# Altium PCB PCB1.PcbDoc (part 6 of 10)
Units mm, origin at the board's own origin, x right, y up, seen from the top; angles counter-clockwise.
Board outline 171.83 x 244.04 mm, 2 copper layers (Top Layer, Bottom Layer); 100 components, 186 nets, 878 pads, 221 vias.
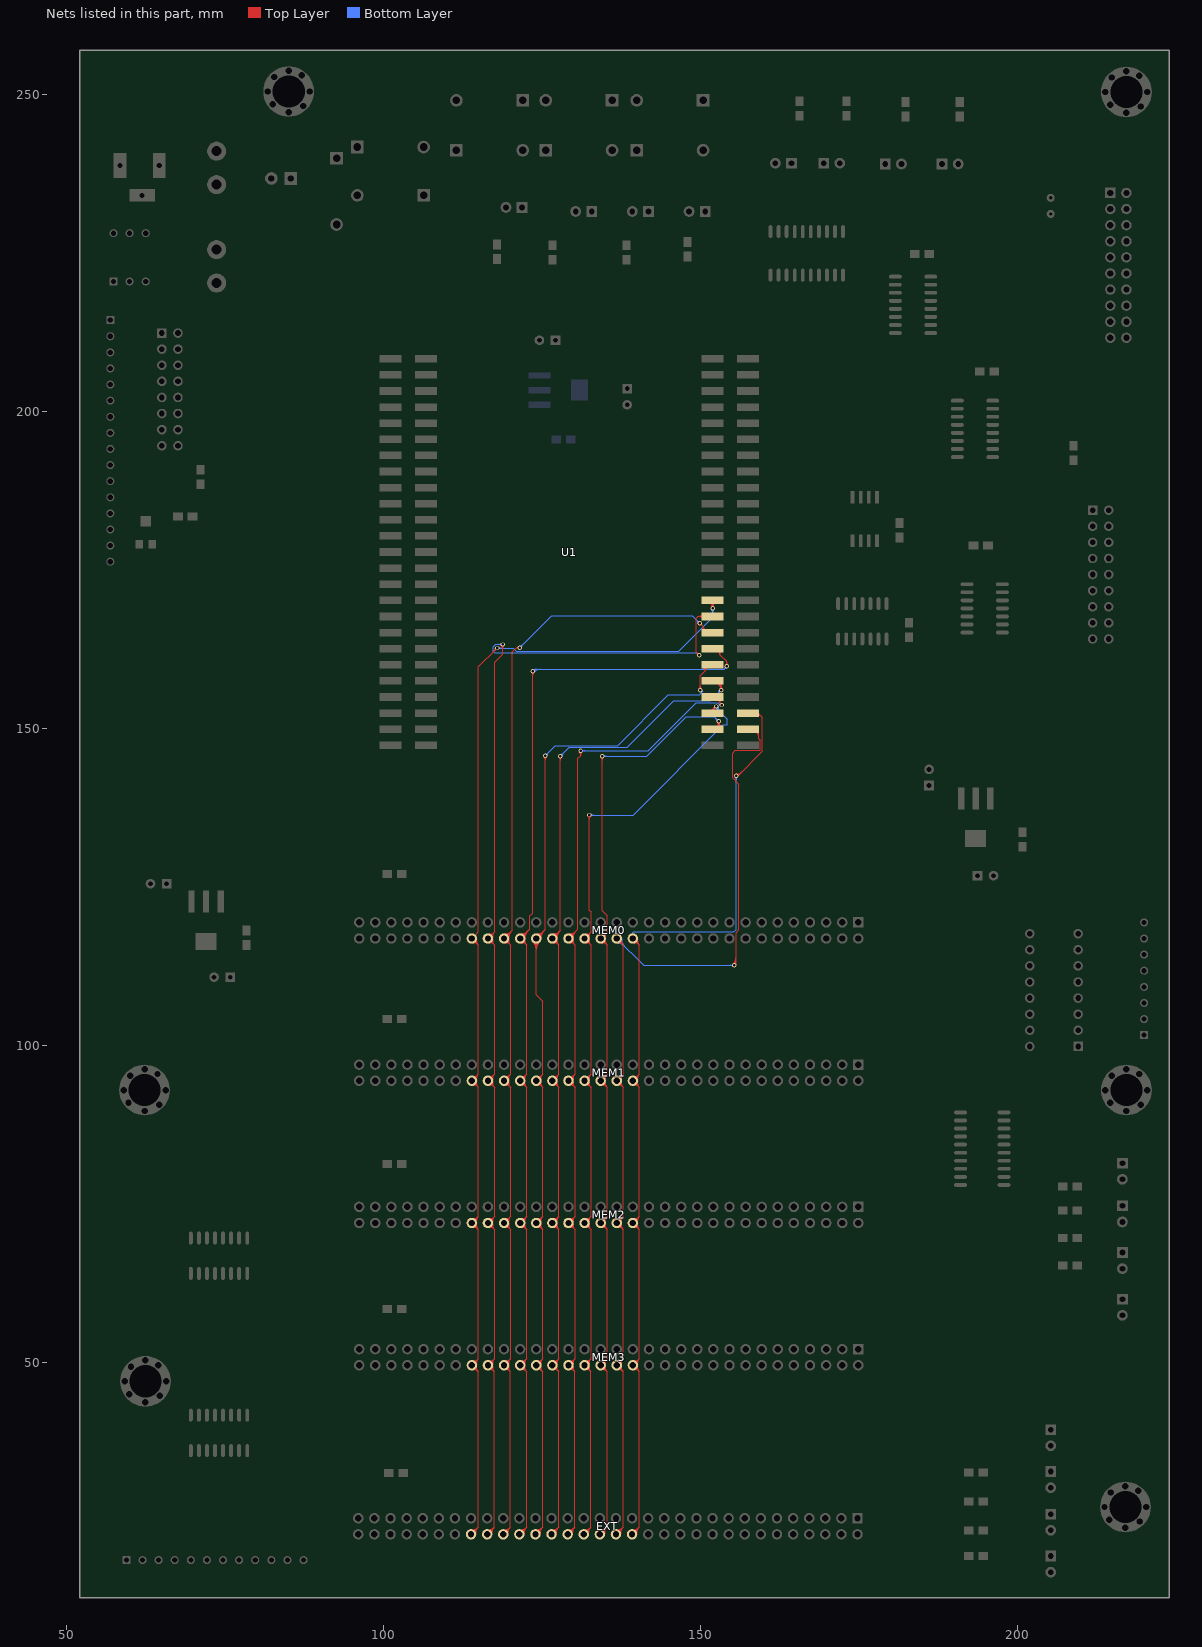
[diagram p6: the nets of this part, all layers, seen from the top]

## Via types
v1: diameter 0.7, hole 0.4, Top Layer to Bottom Layer, 221 vias

## Nets (pads, with @x,y where several pads share a name; then routed paths per layer and width w, separated by ;. In a path a pad name is that pad's centre, name@x,y a point inside that pad or via, vN(x,y) a via of type N, cw(c..) or ccw(c..) an arc to the next point about the centre after c; other vN are vias at no path point) (continued)
D14: EXT.30 MEM0.30 MEM1.30 MEM2.30 MEM3.30 U1.46 | length 198.4
  Top Layer w0.152: EXT.30@139.192,22.86 140.335,24.003 ; EXT.30@139.228,23.302 ccw(c139.295,24.112) 139.87,23.538 ccw(c140.444,22.963) EXT.30@139.634,22.896 ; EXT.30@139.241,23.454 ccw(c139.331,24.542) 140.102,23.77 ccw(c140.874,22.999) EXT.30@139.786,22.909 ; EXT.30@139.254,23.606 ccw(c139.366,24.972) 140.335,24.003 ; MEM0.30@139.319,116.84 140.36,115.799 ; MEM3.30@139.388,49.969 ccw(c139.486,50.598) 139.936,50.147 ccw(c140.387,49.697) MEM3.30@139.758,49.599 ; MEM2.30@139.388,71.528 cw(c139.486,70.899) 139.936,71.349 cw(c140.387,71.799) MEM2.30@139.758,71.898 ; MEM2.30@139.388,72.405 ccw(c139.486,73.034) 139.936,72.584 ccw(c140.387,72.134) MEM2.30@139.758,72.035 ; MEM1.30@139.388,93.965 cw(c139.486,93.336) 139.936,93.786 cw(c140.387,94.236) MEM1.30@139.758,94.335 ; MEM1.30@139.388,94.842 ccw(c139.486,95.471) 139.936,95.021 ccw(c140.387,94.571) MEM1.30@139.758,94.472 ; MEM0.30@139.388,116.401 cw(c139.486,115.772) 139.936,116.223 cw(c140.387,116.673) MEM0.30@139.758,116.771 ; MEM3.30@139.397,49.093 cw(c139.5,48.507) 139.921,48.928 cw(c140.342,49.349) MEM3.30@139.756,49.452 ; MEM3.30@139.411,50.119 ccw(c139.544,50.964) 140.148,50.359 ccw(c140.753,49.755) MEM3.30@139.908,49.622 ; MEM2.30@139.411,71.377 cw(c139.544,70.533) 140.148,71.137 cw(c140.753,71.742) MEM2.30@139.908,71.874 ; MEM2.30@139.411,72.556 ccw(c139.544,73.401) 140.148,72.796 ccw(c140.753,72.191) MEM2.30@139.908,72.059 ; MEM1.30@139.411,93.814 cw(c139.544,92.969) 140.148,93.574 cw(c140.753,94.179) MEM1.30@139.908,94.311 ; MEM1.30@139.411,94.993 ccw(c139.544,95.837) 140.148,95.233 ccw(c140.753,94.628) MEM1.30@139.908,94.496 ; MEM0.30@139.411,116.251 cw(c139.544,115.406) 140.148,116.011 cw(c140.753,116.615) MEM0.30@139.908,116.748 ; MEM3.30@139.423,48.943 cw(c139.563,48.155) 140.128,48.721 cw(c140.694,49.286) MEM3.30@139.906,49.426 ; MEM3.30@139.435,50.27 ccw(c139.601,51.331) 140.36,50.571 ; MEM2.30@139.435,71.227 cw(c139.601,70.166) 140.36,70.925 ; MEM2.30@139.435,72.706 ccw(c139.601,73.767) 140.36,73.008 ; MEM1.30@139.435,93.664 cw(c139.601,92.603) 140.36,93.362 ; MEM1.30@139.435,95.143 ccw(c139.601,96.204) 140.36,95.445 ; MEM0.30@139.435,116.1 cw(c139.601,115.039) 140.36,115.799 ; MEM3.30@139.45,48.793 cw(c139.625,47.804) 140.335,48.514 ; EXT.30@139.938,22.922 cw(c141.304,23.034) 140.335,24.003 ; MEM3.30@140.056,49.399 ccw(c141.045,49.224) 140.335,48.514 ; MEM3.30@140.059,49.646 cw(c141.12,49.812) 140.36,50.571 ; MEM2.30@140.059,71.851 ccw(c141.12,71.685) 140.36,70.925 ; MEM2.30@140.059,72.083 cw(c141.12,72.249) 140.36,73.008 ; MEM1.30@140.059,94.287 ccw(c141.12,94.121) 140.36,93.362 ; MEM1.30@140.059,94.519 cw(c141.12,94.685) 140.36,95.445 ; MEM0.30@140.059,116.724 ccw(c141.12,116.558) 140.36,115.799 ; v1@155.6,142.514 ccw(c155.6,143.175) 156.068,142.707 ; v1(155.6,142.545) 155.905,142.545 159.713,146.352 159.713,151.717 159.029,152.4 U1.46@157.48,152.4 ; v1@155.6,142.666 ccw(c155.6,143.695) 156.328,142.968 ; v1@155.6,142.819 ccw(c155.6,144.215) 156.588,143.228 ; U1.46@158.642,152.335 cw(c158.777,151.61) 159.298,152.131 ; U1.46@158.67,152.185 cw(c158.841,151.265) 159.503,151.926 ; U1.46@158.698,152.035 cw(c158.905,150.92) 159.708,151.722 ; U1.46@159.154,152.4 ccw(c159.454,152.4) 159.242,152.188 ; 140.335,24.003 140.335,48.514 ; 140.335,48.514 MEM3.30@139.319,49.53 140.36,50.571 ; 140.36,50.571 140.36,70.925 ; 140.36,70.925 MEM2.30@139.319,71.967 140.36,73.008 ; 140.36,73.008 140.36,93.362 ; 140.36,93.362 MEM1.30@139.319,94.403 140.36,95.445 ; 140.36,95.445 140.36,115.799
  Bottom Layer w0.152: MEM0.30@139.319,116.84 139.319,117.754 139.446,117.881 155.257,117.881 155.6,118.224 v1(155.6,142.545) ; v1@155.407,142.351 cw(c154.939,141.884) 155.6,141.884 cw(c156.261,141.884) v1@155.794,142.351
D15: EXT.32 MEM0.32 MEM1.32 MEM2.32 MEM3.32 U1.48 | length 218.6
  Top Layer w0.152: EXT.32@136.652,22.86 137.795,24.003 ; EXT.32@136.688,23.302 ccw(c136.755,24.112) 137.33,23.538 ccw(c137.904,22.963) EXT.32@137.094,22.896 ; EXT.32@136.701,23.454 ccw(c136.791,24.542) 137.562,23.77 ccw(c138.334,22.999) EXT.32@137.246,22.909 ; EXT.32@136.714,23.606 ccw(c136.826,24.972) 137.795,24.003 ; MEM0.32@136.779,116.84 137.82,115.799 ; MEM3.32@136.848,49.969 ccw(c136.946,50.598) 137.396,50.147 ccw(c137.847,49.697) MEM3.32@137.218,49.599 ; MEM2.32@136.848,71.528 cw(c136.946,70.899) 137.396,71.349 cw(c137.847,71.799) MEM2.32@137.218,71.898 ; MEM2.32@136.848,72.405 ccw(c136.946,73.034) 137.396,72.584 ccw(c137.847,72.134) MEM2.32@137.218,72.035 ; MEM1.32@136.848,93.965 cw(c136.946,93.336) 137.396,93.786 cw(c137.847,94.236) MEM1.32@137.218,94.335 ; MEM1.32@136.848,94.842 ccw(c136.946,95.471) 137.396,95.021 ccw(c137.847,94.571) MEM1.32@137.218,94.472 ; MEM0.32@136.848,116.401 cw(c136.946,115.772) 137.396,116.223 cw(c137.847,116.673) MEM0.32@137.218,116.771 ; MEM3.32@136.857,49.093 cw(c136.96,48.507) 137.381,48.928 cw(c137.802,49.349) MEM3.32@137.216,49.452 ; MEM3.32@136.871,50.119 ccw(c137.004,50.964) 137.608,50.359 ccw(c138.213,49.755) MEM3.32@137.368,49.622 ; MEM2.32@136.871,71.377 cw(c137.004,70.533) 137.608,71.137 cw(c138.213,71.742) MEM2.32@137.368,71.874 ; MEM2.32@136.871,72.556 ccw(c137.004,73.401) 137.608,72.796 ccw(c138.213,72.191) MEM2.32@137.368,72.059 ; MEM1.32@136.871,93.814 cw(c137.004,92.969) 137.608,93.574 cw(c138.213,94.179) MEM1.32@137.368,94.311 ; MEM1.32@136.871,94.993 ccw(c137.004,95.837) 137.608,95.233 ccw(c138.213,94.628) MEM1.32@137.368,94.496 ; MEM0.32@136.871,116.251 cw(c137.004,115.406) 137.608,116.011 cw(c138.213,116.615) MEM0.32@137.368,116.748 ; MEM3.32@136.883,48.943 cw(c137.023,48.155) 137.588,48.721 cw(c138.154,49.286) MEM3.32@137.366,49.426 ; MEM3.32@136.895,50.27 ccw(c137.061,51.331) 137.82,50.571 ; MEM2.32@136.895,71.227 cw(c137.061,70.166) 137.82,70.925 ; MEM2.32@136.895,72.706 ccw(c137.061,73.767) 137.82,73.008 ; MEM1.32@136.895,93.664 cw(c137.061,92.603) 137.82,93.362 ; MEM1.32@136.895,95.143 ccw(c137.061,96.204) 137.82,95.445 ; MEM0.32@136.895,116.1 cw(c137.061,115.039) 137.82,115.799 ; MEM3.32@136.91,48.793 cw(c137.085,47.804) 137.795,48.514 ; EXT.32@137.398,22.922 cw(c138.764,23.034) 137.795,24.003 ; MEM3.32@137.516,49.399 ccw(c138.505,49.224) 137.795,48.514 ; MEM3.32@137.519,49.646 cw(c138.58,49.812) 137.82,50.571 ; MEM2.32@137.519,71.851 ccw(c138.58,71.685) 137.82,70.925 ; MEM2.32@137.519,72.083 cw(c138.58,72.249) 137.82,73.008 ; MEM1.32@137.519,94.287 ccw(c138.58,94.121) 137.82,93.362 ; MEM1.32@137.519,94.519 cw(c138.58,94.685) 137.82,95.445 ; MEM0.32@137.519,116.724 ccw(c138.58,116.558) 137.82,115.799 ; v1@155.127,112.792 ccw(c153.985,113.934) 155.6,113.934 ; v1@155.235,112.684 ccw(c154.353,113.566) 155.6,113.566 ; v1(155.321,112.598) 155.6,112.878 155.6,117.729 156.058,118.186 156.058,141.199 155.042,142.215 155.042,146.05 155.499,146.507 159.408,146.507 159.433,146.533 159.433,148.107 159.207,148.333 159.207,149.86 U1.48@157.48,149.86 ; v1@155.343,112.576 ccw(c154.721,113.198) 155.6,113.198 ; v1@155.451,112.469 ccw(c155.089,112.83) 155.6,112.83 ; U1.48@158.491,149.516 cw(c158.062,148.454) 159.207,148.454 ; U1.48@158.548,149.657 cw(c158.153,148.68) 159.207,148.68 ; U1.48@158.605,149.798 cw(c158.245,148.906) 159.207,148.906 ; U1.48@158.662,149.94 cw(c158.336,149.132) 159.207,149.132 ; U1.48@158.719,150.081 cw(c158.427,149.358) U1.48@159.207,149.358 ; U1.48@158.776,150.222 cw(c158.518,149.583) U1.48@159.207,149.583 ; 137.795,24.003 137.795,48.514 ; 137.795,48.514 MEM3.32@136.779,49.53 137.82,50.571 ; 137.82,50.571 137.82,70.925 ; 137.82,70.925 MEM2.32@136.779,71.967 137.82,73.008 ; 137.82,73.008 137.82,93.362 ; 137.82,93.362 MEM1.32@136.779,94.403 137.82,95.445 ; 137.82,95.445 137.82,115.799
  Bottom Layer w0.152: MEM0.32@136.779,116.091 cw(c136.779,114.283) 138.057,115.562 cw(c139.336,116.84) MEM0.32@137.528,116.84 ; MEM0.32@136.779,116.244 cw(c136.779,114.804) 137.797,115.822 cw(c138.815,116.84) MEM0.32@137.375,116.84 ; MEM0.32@136.779,116.396 cw(c136.779,115.324) 137.537,116.082 cw(c138.295,116.84) MEM0.32@137.223,116.84 ; MEM0.32@136.779,116.84 141.021,112.598 v1(155.321,112.598) ; v1@155.127,112.405 ccw(c154.66,111.937) 154.66,112.598 ccw(c154.66,113.259) v1@155.127,112.792
D16: EXT.34 MEM0.34 MEM1.34 MEM2.34 MEM3.34 U1.47 | length 201.5
  Top Layer w0.152: EXT.34@134.112,22.86 135.255,24.003 ; EXT.34@134.148,23.302 ccw(c134.215,24.112) 134.79,23.538 ccw(c135.364,22.963) EXT.34@134.554,22.896 ; EXT.34@134.161,23.454 ccw(c134.251,24.542) 135.022,23.77 ccw(c135.794,22.999) EXT.34@134.706,22.909 ; EXT.34@134.174,23.606 ccw(c134.286,24.972) 135.255,24.003 ; v1@134.274,145.425 cw(c133.807,144.957) 134.468,144.957 cw(c135.129,144.957) v1@134.661,145.425 ; MEM3.34@134.308,49.969 ccw(c134.406,50.598) 134.856,50.147 ccw(c135.307,49.697) MEM3.34@134.678,49.599 ; MEM2.34@134.308,71.528 cw(c134.406,70.899) 134.856,71.349 cw(c135.307,71.799) MEM2.34@134.678,71.898 ; MEM2.34@134.308,72.405 ccw(c134.406,73.034) 134.856,72.584 ccw(c135.307,72.134) MEM2.34@134.678,72.035 ; MEM1.34@134.308,93.965 cw(c134.406,93.336) 134.856,93.786 cw(c135.307,94.236) MEM1.34@134.678,94.335 ; MEM1.34@134.308,94.842 ccw(c134.406,95.471) 134.856,95.021 ccw(c135.307,94.571) MEM1.34@134.678,94.472 ; MEM0.34@134.308,116.401 cw(c134.406,115.772) 134.856,116.223 cw(c135.307,116.673) MEM0.34@134.678,116.771 ; MEM0.34@134.308,117.279 ccw(c134.406,117.908) 134.856,117.457 ccw(c135.307,117.007) MEM0.34@134.678,116.909 ; MEM3.34@134.317,49.093 cw(c134.42,48.507) 134.841,48.928 cw(c135.262,49.349) MEM3.34@134.676,49.452 ; MEM3.34@134.331,50.119 ccw(c134.464,50.964) 135.068,50.359 ccw(c135.673,49.755) MEM3.34@134.828,49.622 ; MEM2.34@134.331,71.377 cw(c134.464,70.533) 135.068,71.137 cw(c135.673,71.742) MEM2.34@134.828,71.874 ; MEM2.34@134.331,72.556 ccw(c134.464,73.401) 135.068,72.796 ccw(c135.673,72.191) MEM2.34@134.828,72.059 ; MEM1.34@134.331,93.814 cw(c134.464,92.969) 135.068,93.574 cw(c135.673,94.179) MEM1.34@134.828,94.311 ; MEM1.34@134.331,94.993 ccw(c134.464,95.837) 135.068,95.233 ccw(c135.673,94.628) MEM1.34@134.828,94.496 ; MEM0.34@134.331,116.251 cw(c134.464,115.406) 135.068,116.011 cw(c135.673,116.615) MEM0.34@134.828,116.748 ; MEM0.34@134.331,117.429 ccw(c134.464,118.274) 135.068,117.669 ccw(c135.673,117.065) MEM0.34@134.828,116.932 ; MEM3.34@134.343,48.943 cw(c134.483,48.155) 135.048,48.721 cw(c135.614,49.286) MEM3.34@134.826,49.426 ; MEM3.34@134.355,50.27 ccw(c134.521,51.331) 135.28,50.571 ; MEM2.34@134.355,71.227 cw(c134.521,70.166) 135.28,70.925 ; MEM2.34@134.355,72.706 ccw(c134.521,73.767) 135.28,73.008 ; MEM1.34@134.355,93.664 cw(c134.521,92.603) 135.28,93.362 ; MEM1.34@134.355,95.143 ccw(c134.521,96.204) 135.28,95.445 ; MEM0.34@134.355,116.1 cw(c134.521,115.039) 135.28,115.799 ; MEM0.34@134.355,117.58 ccw(c134.521,118.641) 135.28,117.881 ; MEM3.34@134.37,48.793 cw(c134.545,47.804) 135.255,48.514 ; v1(134.468,145.618) 134.468,121.209 135.28,120.396 135.28,117.881 ; EXT.34@134.858,22.922 cw(c136.224,23.034) 135.255,24.003 ; MEM3.34@134.976,49.399 ccw(c135.965,49.224) 135.255,48.514 ; MEM3.34@134.979,49.646 cw(c136.04,49.812) 135.28,50.571 ; MEM2.34@134.979,71.851 ccw(c136.04,71.685) 135.28,70.925 ; MEM2.34@134.979,72.083 cw(c136.04,72.249) 135.28,73.008 ; MEM1.34@134.979,94.287 ccw(c136.04,94.121) 135.28,93.362 ; MEM1.34@134.979,94.519 cw(c136.04,94.685) 135.28,95.445 ; MEM0.34@134.979,116.724 ccw(c136.04,116.558) 135.28,115.799 ; MEM0.34@134.979,116.956 cw(c136.04,117.122) 135.28,117.881 ; U1.47@151.892,149.86 152.832,149.86 v1(152.832,151.105) ccw(c153.73,151.105) U1.47@153.295,150.318 ; v1@152.638,150.911 cw(c152.171,150.444) 152.832,150.444 cw(c153.493,150.444) v1@153.025,150.911 ; U1.47@152.672,150.23 ccw(c152.285,150.617) 152.832,150.617 ; 152.832,150.588 ccw(c153.444,150.588) U1.47@153.148,150.052 ; v1@152.832,150.846 ccw(c153.587,150.846) U1.47@153.222,150.185 ; 135.255,24.003 135.255,48.514 ; 135.255,48.514 MEM3.34@134.239,49.53 135.28,50.571 ; 135.28,50.571 135.28,70.925 ; 135.28,70.925 MEM2.34@134.239,71.967 135.28,73.008 ; 135.28,73.008 135.28,93.362 ; 135.28,93.362 MEM1.34@134.239,94.403 135.28,95.445 ; 135.28,95.445 135.28,115.799 ; 135.28,115.799 MEM0.34@134.239,116.84 135.28,117.881
  Bottom Layer w0.152: v1(134.468,145.618) 141.529,145.618 147.726,151.816 152.121,151.816 v1(152.832,151.105) ; v1@134.661,145.425 cw(c135.129,144.957) 135.129,145.618 cw(c135.129,146.279) v1@134.661,145.812 ; v1@152.558,151.105 ccw(c151.897,151.105) 152.364,151.572 ccw(c152.832,152.039) v1@152.832,151.378
D17: EXT.36 MEM0.36 MEM1.36 MEM2.36 MEM3.36 U1.45 | length 202.3
  Top Layer w0.152: EXT.36@131.572,22.86 132.715,24.003 ; EXT.36@131.608,23.302 ccw(c131.675,24.112) 132.25,23.538 ccw(c132.824,22.963) EXT.36@132.014,22.896 ; EXT.36@131.621,23.454 ccw(c131.711,24.542) 132.482,23.77 ccw(c133.254,22.999) EXT.36@132.166,22.909 ; EXT.36@131.634,23.606 ccw(c131.746,24.972) 132.715,24.003 ; MEM3.36@131.768,49.969 ccw(c131.866,50.598) 132.316,50.147 ccw(c132.767,49.697) MEM3.36@132.138,49.599 ; MEM2.36@131.768,71.528 cw(c131.866,70.899) 132.316,71.349 cw(c132.767,71.799) MEM2.36@132.138,71.898 ; MEM2.36@131.768,72.405 ccw(c131.866,73.034) 132.316,72.584 ccw(c132.767,72.134) MEM2.36@132.138,72.035 ; MEM1.36@131.768,93.965 cw(c131.866,93.336) 132.316,93.786 cw(c132.767,94.236) MEM1.36@132.138,94.335 ; MEM1.36@131.768,94.842 ccw(c131.866,95.471) 132.316,95.021 ccw(c132.767,94.571) MEM1.36@132.138,94.472 ; MEM0.36@131.768,116.401 cw(c131.866,115.772) 132.316,116.223 cw(c132.767,116.673) MEM0.36@132.138,116.771 ; MEM0.36@131.768,117.279 ccw(c131.866,117.908) 132.316,117.457 ccw(c132.767,117.007) MEM0.36@132.138,116.909 ; MEM3.36@131.777,49.093 cw(c131.88,48.507) 132.301,48.928 cw(c132.722,49.349) MEM3.36@132.136,49.452 ; MEM3.36@131.791,50.119 ccw(c131.924,50.964) 132.528,50.359 ccw(c133.133,49.755) MEM3.36@132.288,49.622 ; MEM2.36@131.791,71.377 cw(c131.924,70.533) 132.528,71.137 cw(c133.133,71.742) MEM2.36@132.288,71.874 ; MEM2.36@131.791,72.556 ccw(c131.924,73.401) 132.528,72.796 ccw(c133.133,72.191) MEM2.36@132.288,72.059 ; MEM1.36@131.791,93.814 cw(c131.924,92.969) 132.528,93.574 cw(c133.133,94.179) MEM1.36@132.288,94.311 ; MEM1.36@131.791,94.993 ccw(c131.924,95.837) 132.528,95.233 ccw(c133.133,94.628) MEM1.36@132.288,94.496 ; MEM0.36@131.791,116.251 cw(c131.924,115.406) 132.528,116.011 cw(c133.133,116.615) MEM0.36@132.288,116.748 ; MEM0.36@131.791,117.429 ccw(c131.924,118.274) 132.528,117.669 ccw(c133.133,117.065) MEM0.36@132.288,116.932 ; MEM3.36@131.803,48.943 cw(c131.943,48.155) 132.508,48.721 cw(c133.074,49.286) MEM3.36@132.286,49.426 ; MEM3.36@131.815,50.27 ccw(c131.981,51.331) 132.74,50.571 ; MEM2.36@131.815,71.227 cw(c131.981,70.166) 132.74,70.925 ; MEM2.36@131.815,72.706 ccw(c131.981,73.767) 132.74,73.008 ; MEM1.36@131.815,93.664 cw(c131.981,92.603) 132.74,93.362 ; MEM1.36@131.815,95.143 ccw(c131.981,96.204) 132.74,95.445 ; MEM0.36@131.815,116.1 cw(c131.981,115.039) 132.74,115.799 ; MEM0.36@131.815,117.58 ccw(c131.981,118.641) 132.74,117.881 ; MEM3.36@131.83,48.793 cw(c132.005,47.804) 132.715,48.514 ; v1@132.267,136.128 cw(c131.8,135.661) 132.461,135.661 cw(c133.122,135.661) v1@132.655,136.128 ; EXT.36@132.318,22.922 cw(c133.684,23.034) 132.715,24.003 ; MEM3.36@132.436,49.399 ccw(c133.425,49.224) 132.715,48.514 ; MEM3.36@132.439,49.646 cw(c133.5,49.812) 132.74,50.571 ; MEM2.36@132.439,71.851 ccw(c133.5,71.685) 132.74,70.925 ; MEM2.36@132.439,72.083 cw(c133.5,72.249) 132.74,73.008 ; MEM1.36@132.439,94.287 ccw(c133.5,94.121) 132.74,93.362 ; MEM1.36@132.439,94.519 cw(c133.5,94.685) 132.74,95.445 ; MEM0.36@132.439,116.724 ccw(c133.5,116.558) 132.74,115.799 ; MEM0.36@132.439,116.956 cw(c133.5,117.122) 132.74,117.881 ; v1(132.461,136.322) 132.461,121.31 132.74,121.031 132.74,117.881 ; U1.45@151.792,152.914 ccw(c151.769,153.035) 151.892,153.035 ; U1.45@151.892,152.4 151.892,153.035 ; U1.45@151.941,152.445 cw(c152.295,152.764) 151.958,153.101 ; U1.45@151.992,152.914 cw(c152.015,153.035) 151.892,153.035 ; 152.013,153.156 cw(c152.42,152.748) v1@152.487,153.321 ; U1.45@152.055,152.547 cw(c152.414,152.872) 152.072,153.215 ; U1.45@152.168,152.649 cw(c152.534,152.979) v1@152.185,153.328 ; U1.45@152.281,152.751 cw(c152.653,153.087) v1@152.298,153.441 ; v1(152.502,153.441) v1@152.298,153.441 ; 132.715,24.003 132.715,48.514 ; 132.715,48.514 MEM3.36@131.699,49.53 132.74,50.571 ; 132.74,50.571 132.74,70.925 ; 132.74,70.925 MEM2.36@131.699,71.967 132.74,73.008 ; 132.74,73.008 132.74,93.362 ; 132.74,93.362 MEM1.36@131.699,94.403 132.74,95.445 ; 132.74,95.445 132.74,115.799 ; 132.74,115.799 MEM0.36@131.699,116.84 132.74,117.881 ; 151.892,153.035 v1@152.298,153.441
  Bottom Layer w0.152: v1(132.461,136.322) 139.344,136.322 153.599,150.577 154.178,150.577 154.223,150.622 154.223,151.453 152.502,153.175 v1(152.502,153.441) ; v1@132.655,136.128 cw(c133.122,135.661) 133.122,136.322 cw(c133.122,136.983) v1@132.655,136.515 ; v1@152.471,153.441 ccw(c153.04,153.441) 152.637,153.039 ; v1@152.623,153.441 ccw(c153.56,153.441) 152.897,152.779 ; v1@152.775,153.441 ccw(c154.08,153.441) 153.158,152.519
D18: EXT.38 MEM0.38 MEM1.38 MEM2.38 MEM3.38 U1.43 | length 206.1
  Top Layer w0.152: EXT.38@129.032,22.86 130.175,24.003 ; EXT.38@129.068,23.302 ccw(c129.135,24.112) 129.71,23.538 ccw(c130.284,22.963) EXT.38@129.474,22.896 ; EXT.38@129.081,23.454 ccw(c129.171,24.542) 129.942,23.77 ccw(c130.714,22.999) EXT.38@129.626,22.909 ; EXT.38@129.094,23.606 ccw(c129.206,24.972) 130.175,24.003 ; MEM0.38@129.159,117.284 ccw(c129.159,118.356) 129.917,117.598 ccw(c130.675,116.84) MEM0.38@129.603,116.84 ; MEM0.38@129.159,117.436 ccw(c129.159,118.876) 130.177,117.858 ccw(c131.195,116.84) MEM0.38@129.755,116.84 ; MEM0.38@129.159,117.589 ccw(c129.159,119.397) 130.437,118.118 ccw(c131.716,116.84) MEM0.38@129.908,116.84 ; MEM3.38@129.228,49.969 ccw(c129.326,50.598) 129.776,50.147 ccw(c130.227,49.697) MEM3.38@129.598,49.599 ; MEM2.38@129.228,71.528 cw(c129.326,70.899) 129.776,71.349 cw(c130.227,71.799) MEM2.38@129.598,71.898 ; MEM2.38@129.228,72.405 ccw(c129.326,73.034) 129.776,72.584 ccw(c130.227,72.134) MEM2.38@129.598,72.035 ; MEM1.38@129.228,93.965 cw(c129.326,93.336) 129.776,93.786 cw(c130.227,94.236) MEM1.38@129.598,94.335 ; MEM1.38@129.228,94.842 ccw(c129.326,95.471) 129.776,95.021 ccw(c130.227,94.571) MEM1.38@129.598,94.472 ; MEM0.38@129.228,116.401 cw(c129.326,115.772) 129.776,116.223 cw(c130.227,116.673) MEM0.38@129.598,116.771 ; MEM3.38@129.237,49.093 cw(c129.34,48.507) 129.761,48.928 cw(c130.182,49.349) MEM3.38@129.596,49.452 ; MEM3.38@129.251,50.119 ccw(c129.384,50.964) 129.988,50.359 ccw(c130.593,49.755) MEM3.38@129.748,49.622 ; MEM2.38@129.251,71.377 cw(c129.384,70.533) 129.988,71.137 cw(c130.593,71.742) MEM2.38@129.748,71.874 ; MEM2.38@129.251,72.556 ccw(c129.384,73.401) 129.988,72.796 ccw(c130.593,72.191) MEM2.38@129.748,72.059 ; MEM1.38@129.251,93.814 cw(c129.384,92.969) 129.988,93.574 cw(c130.593,94.179) MEM1.38@129.748,94.311 ; MEM1.38@129.251,94.993 ccw(c129.384,95.837) 129.988,95.233 ccw(c130.593,94.628) MEM1.38@129.748,94.496 ; MEM0.38@129.251,116.251 cw(c129.384,115.406) 129.988,116.011 cw(c130.593,116.615) MEM0.38@129.748,116.748 ; MEM3.38@129.263,48.943 cw(c129.403,48.155) 129.968,48.721 cw(c130.534,49.286) MEM3.38@129.746,49.426 ; MEM3.38@129.275,50.27 ccw(c129.441,51.331) 130.2,50.571 ; MEM2.38@129.275,71.227 cw(c129.441,70.166) 130.2,70.925 ; MEM2.38@129.275,72.706 ccw(c129.441,73.767) 130.2,73.008 ; MEM1.38@129.275,93.664 cw(c129.441,92.603) 130.2,93.362 ; MEM1.38@129.275,95.143 ccw(c129.441,96.204) 130.2,95.445 ; MEM0.38@129.275,116.1 cw(c129.441,115.039) 130.2,115.799 ; MEM3.38@129.29,48.793 cw(c129.465,47.804) 130.175,48.514 ; EXT.38@129.778,22.922 cw(c131.144,23.034) 130.175,24.003 ; MEM3.38@129.896,49.399 ccw(c130.885,49.224) 130.175,48.514 ; MEM3.38@129.899,49.646 cw(c130.96,49.812) 130.2,50.571 ; MEM2.38@129.899,71.851 ccw(c130.96,71.685) 130.2,70.925 ; MEM2.38@129.899,72.083 cw(c130.96,72.249) 130.2,73.008 ; MEM1.38@129.899,94.287 ccw(c130.96,94.121) 130.2,93.362 ; MEM1.38@129.899,94.519 cw(c130.96,94.685) 130.2,95.445 ; MEM0.38@129.899,116.724 ccw(c130.96,116.558) 130.2,115.799 ; v1@130.87,146.237 cw(c130.403,145.77) 131.064,145.77 cw(c131.725,145.77) v1@131.258,146.237 ; v1(131.064,146.431) 131.064,145.694 130.658,145.288 130.658,118.339 MEM0.38@129.159,116.84 130.2,115.799 ; U1.43@151.892,154.94 153.035,154.94 153.035,153.987 ; U1.43@152.756,154.501 cw(c152.423,153.988) 153.035,153.988 ; U1.43@152.84,154.629 cw(c152.605,154.268) 153.035,154.268 ; 153.035,154.261 cw(c153.462,154.261) U1.43@153.237,154.624 ; U1.43@153.318,154.495 ccw(c153.631,153.988) 153.035,153.988 ; v1(153.352,153.67) 153.035,153.987 ; 130.175,24.003 130.175,48.514 ; 130.175,48.514 MEM3.38@129.159,49.53 130.2,50.571 ; 130.2,50.571 130.2,70.925 ; 130.2,70.925 MEM2.38@129.159,71.967 130.2,73.008 ; 130.2,73.008 130.2,93.362 ; 130.2,93.362 MEM1.38@129.159,94.403 130.2,95.445 ; 130.2,95.445 130.2,115.799
  Bottom Layer w0.152: v1(131.064,146.431) 141.757,146.431 149.321,153.995 152.733,153.995 153.058,153.67 v1(153.352,153.67) ; v1@131.258,146.237 cw(c131.725,145.77) 131.725,146.431 cw(c131.725,147.092) v1@131.258,146.625
D19: EXT.40 MEM0.40 MEM1.40 MEM2.40 MEM3.40 U1.41 | length 212.8
  Top Layer w0.152: EXT.40@126.492,22.86 127.635,24.003 ; EXT.40@126.528,23.302 ccw(c126.595,24.112) 127.17,23.538 ccw(c127.744,22.963) EXT.40@126.934,22.896 ; EXT.40@126.541,23.454 ccw(c126.631,24.542) 127.402,23.77 ccw(c128.174,22.999) EXT.40@127.086,22.909 ; EXT.40@126.554,23.606 ccw(c126.666,24.972) 127.635,24.003 ; MEM0.40@126.621,117.284 ccw(c126.626,118.339) 127.372,117.593 ccw(c128.118,116.847) MEM0.40@127.063,116.842 ; MEM0.40@126.622,117.436 ccw(c126.628,118.854) 127.63,117.851 ccw(c128.633,116.849) MEM0.40@127.215,116.843 ; MEM0.40@126.622,117.589 ccw(c126.631,119.368) 127.889,118.11 ; MEM3.40@126.688,49.969 ccw(c126.786,50.598) 127.236,50.147 ccw(c127.687,49.697) MEM3.40@127.058,49.599 ; MEM2.40@126.688,71.528 cw(c126.786,70.899) 127.236,71.349 cw(c127.687,71.799) MEM2.40@127.058,71.898 ; MEM2.40@126.688,72.405 ccw(c126.786,73.034) 127.236,72.584 ccw(c127.687,72.134) MEM2.40@127.058,72.035 ; MEM1.40@126.688,93.965 cw(c126.786,93.336) 127.236,93.786 cw(c127.687,94.236) MEM1.40@127.058,94.335 ; MEM1.40@126.688,94.842 ccw(c126.786,95.471) 127.236,95.021 ccw(c127.687,94.571) MEM1.40@127.058,94.472 ; MEM0.40@126.688,116.401 cw(c126.786,115.772) 127.236,116.223 cw(c127.687,116.673) MEM0.40@127.058,116.771 ; MEM3.40@126.697,49.093 cw(c126.8,48.507) 127.221,48.928 cw(c127.642,49.349) MEM3.40@127.056,49.452 ; MEM3.40@126.711,50.119 ccw(c126.844,50.964) 127.448,50.359 ccw(c128.053,49.755) MEM3.40@127.208,49.622 ; MEM2.40@126.711,71.377 cw(c126.844,70.533) 127.448,71.137 cw(c128.053,71.742) MEM2.40@127.208,71.874 ; MEM2.40@126.711,72.556 ccw(c126.844,73.401) 127.448,72.796 ccw(c128.053,72.191) MEM2.40@127.208,72.059 ; MEM1.40@126.711,93.814 cw(c126.844,92.969) 127.448,93.574 cw(c128.053,94.179) MEM1.40@127.208,94.311 ; MEM1.40@126.711,94.993 ccw(c126.844,95.837) 127.448,95.233 ccw(c128.053,94.628) MEM1.40@127.208,94.496 ; MEM0.40@126.711,116.251 cw(c126.844,115.406) 127.448,116.011 cw(c128.053,116.615) MEM0.40@127.208,116.748 ; MEM3.40@126.723,48.943 cw(c126.863,48.155) 127.428,48.721 cw(c127.994,49.286) MEM3.40@127.206,49.426 ; MEM3.40@126.735,50.27 ccw(c126.901,51.331) 127.66,50.571 ; MEM2.40@126.735,71.227 cw(c126.901,70.166) 127.66,70.925 ; MEM2.40@126.735,72.706 ccw(c126.901,73.767) 127.66,73.008 ; MEM1.40@126.735,93.664 cw(c126.901,92.603) 127.66,93.362 ; MEM1.40@126.735,95.143 ccw(c126.901,96.204) 127.66,95.445 ; MEM0.40@126.735,116.1 cw(c126.901,115.039) 127.66,115.799 ; MEM3.40@126.75,48.793 cw(c126.925,47.804) 127.635,48.514 ; EXT.40@127.238,22.922 cw(c128.604,23.034) 127.635,24.003 ; MEM3.40@127.356,49.399 ccw(c128.345,49.224) 127.635,48.514 ; MEM3.40@127.359,49.646 cw(c128.42,49.812) 127.66,50.571 ; MEM2.40@127.359,71.851 ccw(c128.42,71.685) 127.66,70.925 ; MEM2.40@127.359,72.083 cw(c128.42,72.249) 127.66,73.008 ; MEM1.40@127.359,94.287 ccw(c128.42,94.121) 127.66,93.362 ; MEM1.40@127.359,94.519 cw(c128.42,94.685) 127.66,95.445 ; MEM0.40@127.359,116.724 ccw(c128.42,116.558) 127.66,115.799 ; MEM0.40@127.368,116.843 cw(c129.147,116.852) 127.889,118.11 ; v1@127.695,145.425 cw(c127.228,144.957) 127.889,144.957 cw(c128.55,144.957) v1@128.083,145.425 ; v1(127.889,145.618) 127.889,118.11 ; U1.41@151.892,157.48 153.238,157.48 v1(153.238,156.032) ; U1.41@152.723,157.065 cw(c151.92,156.019) v1@153.238,156.019 ; U1.41@152.816,157.185 cw(c152.157,156.328) v1@153.238,156.328 ; U1.41@152.909,157.306 cw(c152.395,156.638) 153.238,156.638 ; v1@153.045,156.226 ccw(c152.577,156.693) 153.238,156.693 ccw(c153.899,156.693) v1@153.432,156.226 ; 153.238,156.689 cw(c153.833,156.689) U1.41@153.412,157.11 ; 127.635,24.003 127.635,48.514 ; 127.635,48.514 MEM3.40@126.619,49.53 127.66,50.571 ; 127.66,50.571 127.66,70.925 ; 127.66,70.925 MEM2.40@126.619,71.967 127.66,73.008 ; 127.66,73.008 127.66,93.362 ; 127.66,93.362 MEM1.40@126.619,94.403 127.66,95.445 ; 127.66,95.445 127.66,115.799 ; 127.66,115.799 MEM0.40@126.619,116.84 127.889,118.11
  Bottom Layer w0.152: v1(127.889,145.618) 129.255,146.984 138.399,146.984 145.771,154.356 151.562,154.356 v1(153.238,156.032) ; v1@127.889,145.892 ccw(c127.889,146.553) 128.356,146.086 ccw(c128.824,145.618) v1@128.163,145.618 ; v1@152.964,156.032 cw(c152.303,156.032) 152.771,155.565 cw(c153.238,155.097) v1@153.238,155.758
D20: EXT.42 MEM0.42 MEM1.42 MEM2.42 MEM3.42 U1.39 | length 215.4
  Top Layer w0.152: MEM0.42@123.55,116.311 cw(c122.271,115.032) 124.079,115.032 cw(c125.887,115.032) MEM0.42@124.608,116.311 ; MEM0.42@123.657,116.418 cw(c122.639,115.4) 124.079,115.4 cw(c125.519,115.4) MEM0.42@124.501,116.418 ; MEM0.42@123.765,116.526 cw(c123.007,115.768) 124.079,115.768 cw(c125.151,115.768) MEM0.42@124.393,116.526 ; EXT.42@123.952,22.86 125.095,24.003 ; EXT.42@123.988,23.302 ccw(c124.055,24.112) 124.63,23.538 ccw(c125.204,22.963) EXT.42@124.394,22.896 ; EXT.42@124.001,23.454 ccw(c124.091,24.542) 124.862,23.77 ccw(c125.634,22.999) EXT.42@124.546,22.909 ; EXT.42@124.014,23.606 ccw(c124.126,24.972) 125.095,24.003 ; MEM0.42@124.079,117.284 ccw(c124.079,118.356) 124.837,117.598 ccw(c125.595,116.84) MEM0.42@124.523,116.84 ; MEM0.42@124.079,117.436 ccw(c124.079,118.876) 125.097,117.858 ccw(c126.115,116.84) MEM0.42@124.675,116.84 ; MEM0.42@124.079,117.589 ccw(c124.079,119.397) 125.357,118.118 ccw(c126.636,116.84) MEM0.42@124.828,116.84 ; MEM3.42@124.148,49.969 ccw(c124.246,50.598) 124.696,50.147 ccw(c125.147,49.697) MEM3.42@124.518,49.599 ; MEM2.42@124.148,71.528 cw(c124.246,70.899) 124.696,71.349 cw(c125.147,71.799) MEM2.42@124.518,71.898 ; MEM2.42@124.148,72.405 ccw(c124.246,73.034) 124.696,72.584 ccw(c125.147,72.134) MEM2.42@124.518,72.035 ; MEM1.42@124.148,93.965 cw(c124.246,93.336) 124.696,93.786 cw(c125.147,94.236) MEM1.42@124.518,94.335 ; MEM1.42@124.148,94.842 ccw(c124.246,95.471) 124.696,95.021 ccw(c125.147,94.571) MEM1.42@124.518,94.472 ; MEM3.42@124.157,49.093 cw(c124.26,48.507) 124.681,48.928 cw(c125.102,49.349) MEM3.42@124.516,49.452 ; MEM3.42@124.171,50.119 ccw(c124.304,50.964) 124.908,50.359 ccw(c125.513,49.755) MEM3.42@124.668,49.622 ; MEM2.42@124.171,71.377 cw(c124.304,70.533) 124.908,71.137 cw(c125.513,71.742) MEM2.42@124.668,71.874 ; MEM2.42@124.171,72.556 ccw(c124.304,73.401) 124.908,72.796 ccw(c125.513,72.191) MEM2.42@124.668,72.059 ; MEM1.42@124.171,93.814 cw(c124.304,92.969) 124.908,93.574 cw(c125.513,94.179) MEM1.42@124.668,94.311 ; MEM1.42@124.171,94.993 ccw(c124.304,95.837) 124.908,95.233 ccw(c125.513,94.628) MEM1.42@124.668,94.496 ; MEM3.42@124.183,48.943 cw(c124.323,48.155) 124.888,48.721 cw(c125.454,49.286) MEM3.42@124.666,49.426 ; MEM3.42@124.195,50.27 ccw(c124.361,51.331) 125.12,50.571 ; MEM2.42@124.195,71.227 cw(c124.361,70.166) 125.12,70.925 ; MEM2.42@124.195,72.706 ccw(c124.361,73.767) 125.12,73.008 ; MEM1.42@124.195,93.664 cw(c124.361,92.603) 125.12,93.362 ; MEM1.42@124.195,95.143 ccw(c124.361,96.204) 125.12,95.445 ; MEM3.42@124.21,48.793 cw(c124.385,47.804) 125.095,48.514 ; EXT.42@124.698,22.922 cw(c126.064,23.034) 125.095,24.003 ; MEM3.42@124.816,49.399 ccw(c125.805,49.224) 125.095,48.514 ; MEM3.42@124.819,49.646 cw(c125.88,49.812) 125.12,50.571 ; MEM2.42@124.819,71.851 ccw(c125.88,71.685) 125.12,70.925 ; MEM2.42@124.819,72.083 cw(c125.88,72.249) 125.12,73.008 ; MEM1.42@124.819,94.287 ccw(c125.88,94.121) 125.12,93.362 ; MEM1.42@124.819,94.519 cw(c125.88,94.685) 125.12,95.445 ; v1@125.308,145.475 cw(c124.84,145.008) 125.501,145.008 cw(c126.162,145.008) v1@125.695,145.475 ; v1(125.501,145.669) 125.501,118.262 MEM0.42@124.079,116.84 124.079,107.95 125.12,106.909 125.12,95.445 ; v1@149.745,156.226 ccw(c149.278,156.693) 149.939,156.693 ccw(c150.6,156.693) v1@150.132,156.226 ; v1(149.939,156.032) 149.939,158.293 150.749,159.103 ; U1.39@150.481,159.566 cw(c150.215,159.103) 150.749,159.103 ; U1.39@150.557,159.698 cw(c150.367,159.366) 150.749,159.366 ; 150.749,159.373 cw(c151.133,159.373) U1.39@150.934,159.702 ; U1.39@151.013,159.572 ccw(c151.297,159.103) 150.749,159.103 ; U1.39@151.892,160.02 150.749,160.02 150.749,159.103 ; 125.095,24.003 125.095,48.514 ; 125.095,48.514 MEM3.42@124.079,49.53 125.12,50.571 ; 125.12,50.571 125.12,70.925 ; 125.12,70.925 MEM2.42@124.079,71.967 125.12,73.008 ; 125.12,73.008 125.12,93.362 ; 125.12,93.362 MEM1.42@124.079,94.403 125.12,95.445
  Bottom Layer w0.152: v1(125.501,145.669) 127.096,147.264 136.901,147.264 144.907,155.27 149.86,155.27 150.343,155.804 150.114,156.032 v1(149.939,156.032) ; v1@125.501,145.943 ccw(c125.501,146.604) 125.969,146.136 ccw(c126.436,145.669) v1@125.775,145.669 ; v1@149.989,155.922 cw(c150.096,155.691) 150.275,155.871 ; v1@150.213,156.032 ccw(c150.45,156.032) 150.282,155.864
D21: EXT.44 MEM0.44 MEM1.44 MEM2.44 MEM3.44 U1.37 | length 229.4
  Top Layer w0.152: EXT.44@121.412,22.86 122.555,24.003 ; EXT.44@121.448,23.302 ccw(c121.515,24.112) 122.09,23.538 ccw(c122.664,22.963) EXT.44@121.854,22.896 ; EXT.44@121.461,23.454 ccw(c121.551,24.542) 122.322,23.77 ccw(c123.094,22.999) EXT.44@122.006,22.909 ; EXT.44@121.474,23.606 ccw(c121.586,24.972) 122.555,24.003 ; MEM0.44@121.539,117.284 ccw(c121.539,118.356) 122.297,117.598 ccw(c123.055,116.84) MEM0.44@121.983,116.84 ; MEM0.44@121.539,117.436 ccw(c121.539,118.876) 122.557,117.858 ccw(c123.575,116.84) MEM0.44@122.135,116.84 ; MEM0.44@121.539,117.589 ccw(c121.539,119.397) 122.817,118.118 ccw(c124.096,116.84) MEM0.44@122.288,116.84 ; MEM3.44@121.608,49.969 ccw(c121.706,50.598) 122.156,50.147 ccw(c122.607,49.697) MEM3.44@121.978,49.599 ; MEM2.44@121.608,71.528 cw(c121.706,70.899) 122.156,71.349 cw(c122.607,71.799) MEM2.44@121.978,71.898 ; MEM2.44@121.608,72.405 ccw(c121.706,73.034) 122.156,72.584 ccw(c122.607,72.134) MEM2.44@121.978,72.035 ; MEM1.44@121.608,93.965 cw(c121.706,93.336) 122.156,93.786 cw(c122.607,94.236) MEM1.44@121.978,94.335 ; MEM1.44@121.608,94.842 ccw(c121.706,95.471) 122.156,95.021 ccw(c122.607,94.571) MEM1.44@121.978,94.472 ; MEM0.44@121.608,116.401 cw(c121.706,115.772) 122.156,116.223 cw(c122.607,116.673) MEM0.44@121.978,116.771 ; MEM3.44@121.617,49.093 cw(c121.72,48.507) 122.141,48.928 cw(c122.562,49.349) MEM3.44@121.976,49.452 ; MEM3.44@121.631,50.119 ccw(c121.764,50.964) 122.368,50.359 ccw(c122.973,49.755) MEM3.44@122.128,49.622 ; MEM2.44@121.631,71.377 cw(c121.764,70.533) 122.368,71.137 cw(c122.973,71.742) MEM2.44@122.128,71.874 ; MEM2.44@121.631,72.556 ccw(c121.764,73.401) 122.368,72.796 ccw(c122.973,72.191) MEM2.44@122.128,72.059 ; MEM1.44@121.631,93.814 cw(c121.764,92.969) 122.368,93.574 cw(c122.973,94.179) MEM1.44@122.128,94.311 ; MEM1.44@121.631,94.993 ccw(c121.764,95.837) 122.368,95.233 ccw(c122.973,94.628) MEM1.44@122.128,94.496 ; MEM0.44@121.631,116.251 cw(c121.764,115.406) 122.368,116.011 cw(c122.973,116.615) MEM0.44@122.128,116.748 ; MEM3.44@121.643,48.943 cw(c121.783,48.155) 122.348,48.721 cw(c122.914,49.286) MEM3.44@122.126,49.426 ; MEM3.44@121.655,50.27 ccw(c121.821,51.331) 122.58,50.571 ; MEM2.44@121.655,71.227 cw(c121.821,70.166) 122.58,70.925 ; MEM2.44@121.655,72.706 ccw(c121.821,73.767) 122.58,73.008 ; MEM1.44@121.655,93.664 cw(c121.821,92.603) 122.58,93.362 ; MEM1.44@121.655,95.143 ccw(c121.821,96.204) 122.58,95.445 ; MEM0.44@121.655,116.1 cw(c121.821,115.039) 122.58,115.799 ; MEM3.44@121.67,48.793 cw(c121.845,47.804) 122.555,48.514 ; EXT.44@122.158,22.922 cw(c123.524,23.034) 122.555,24.003 ; MEM3.44@122.276,49.399 ccw(c123.265,49.224) 122.555,48.514 ; MEM3.44@122.279,49.646 cw(c123.34,49.812) 122.58,50.571 ; MEM2.44@122.279,71.851 ccw(c123.34,71.685) 122.58,70.925 ; MEM2.44@122.279,72.083 cw(c123.34,72.249) 122.58,73.008 ; MEM1.44@122.279,94.287 ccw(c123.34,94.121) 122.58,93.362 ; MEM1.44@122.279,94.519 cw(c123.34,94.685) 122.58,95.445 ; MEM0.44@122.279,116.724 ccw(c123.34,116.558) 122.58,115.799 ; v1@123.352,158.836 cw(c122.885,158.368) 123.546,158.368 cw(c124.207,158.368) v1@123.739,158.836 ; v1(123.546,159.029) 123.546,153.365 123.495,153.314 123.495,120.853 123.038,120.396 123.038,118.339 MEM0.44@121.539,116.84 122.58,115.799 ; U1.37@151.892,162.56 153.035,162.56 153.035,161.634 ; U1.37@152.767,162.114 cw(c152.47,161.634) 153.035,161.634 ; U1.37@152.847,162.244 cw(c152.639,161.907) 153.035,161.907 ; 153.035,161.9 cw(c153.429,161.9) U1.37@153.23,162.24 ; U1.37@153.307,162.108 ccw(c153.585,161.634) 153.035,161.634 ; v1@153.934,159.96 ccw(c153.466,160.427) 154.127,160.427 ccw(c154.788,160.427) v1@154.321,159.96 ; v1(154.127,159.766) 154.127,160.541 153.035,161.634 ; 122.555,24.003 122.555,48.514 ; 122.555,48.514 MEM3.44@121.539,49.53 122.58,50.571 ; 122.58,50.571 122.58,70.925 ; 122.58,70.925 MEM2.44@121.539,71.967 122.58,73.008 ; 122.58,73.008 122.58,93.362 ; 122.58,93.362 MEM1.44@121.539,94.403 122.58,95.445 ; 122.58,95.445 122.58,115.799
  Bottom Layer w0.152: v1@123.524,159.051 cw(c124.084,158.491) 124.084,159.283 ; v1(123.546,159.029) 123.8,159.283 153.708,159.283 154.127,159.702 v1(154.127,159.766) ; v1@123.631,158.944 cw(c124.452,158.123) 124.452,159.283 ; v1@123.739,158.836 cw(c124.82,157.755) 124.82,159.283 ; 153.74,159.315 ccw(c153.431,159.624) v1@153.859,159.711 ; 153.768,159.343 cw(c154.127,158.984) v1@154.127,159.492
D22: EXT.46 MEM0.46 MEM1.46 MEM2.46 MEM3.46 U1.35 | length 230.4
  Top Layer w0.152: EXT.46@118.872,22.86 120.015,24.003 ; EXT.46@118.908,23.302 ccw(c118.975,24.112) 119.55,23.538 ccw(c120.124,22.963) EXT.46@119.314,22.896 ; EXT.46@118.921,23.454 ccw(c119.011,24.542) 119.782,23.77 ccw(c120.554,22.999) EXT.46@119.466,22.909 ; EXT.46@118.934,23.606 ccw(c119.046,24.972) 120.015,24.003 ; MEM0.46@119.001,117.284 ccw(c119.006,118.339) 119.752,117.593 ccw(c120.498,116.847) MEM0.46@119.443,116.842 ; MEM0.46@119.002,117.436 ccw(c119.008,118.854) 120.01,117.851 ccw(c121.013,116.849) MEM0.46@119.595,116.843 ; MEM0.46@119.002,117.589 ccw(c119.011,119.368) 120.269,118.11 ; MEM3.46@119.068,49.969 ccw(c119.166,50.598) 119.616,50.147 ccw(c120.067,49.697) MEM3.46@119.438,49.599 ; MEM2.46@119.068,71.528 cw(c119.166,70.899) 119.616,71.349 cw(c120.067,71.799) MEM2.46@119.438,71.898 ; MEM2.46@119.068,72.405 ccw(c119.166,73.034) 119.616,72.584 ccw(c120.067,72.134) MEM2.46@119.438,72.035 ; MEM1.46@119.068,93.965 cw(c119.166,93.336) 119.616,93.786 cw(c120.067,94.236) MEM1.46@119.438,94.335 ; MEM1.46@119.068,94.842 ccw(c119.166,95.471) 119.616,95.021 ccw(c120.067,94.571) MEM1.46@119.438,94.472 ; MEM0.46@119.068,116.401 cw(c119.166,115.772) 119.616,116.223 cw(c120.067,116.673) MEM0.46@119.438,116.771 ; MEM3.46@119.077,49.093 cw(c119.18,48.507) 119.601,48.928 cw(c120.022,49.349) MEM3.46@119.436,49.452 ; MEM3.46@119.091,50.119 ccw(c119.224,50.964) 119.828,50.359 ccw(c120.433,49.755) MEM3.46@119.588,49.622 ; MEM2.46@119.091,71.377 cw(c119.224,70.533) 119.828,71.137 cw(c120.433,71.742) MEM2.46@119.588,71.874 ; MEM2.46@119.091,72.556 ccw(c119.224,73.401) 119.828,72.796 ccw(c120.433,72.191) MEM2.46@119.588,72.059 ; MEM1.46@119.091,93.814 cw(c119.224,92.969) 119.828,93.574 cw(c120.433,94.179) MEM1.46@119.588,94.311 ; MEM1.46@119.091,94.993 ccw(c119.224,95.837) 119.828,95.233 ccw(c120.433,94.628) MEM1.46@119.588,94.496 ; MEM0.46@119.091,116.251 cw(c119.224,115.406) 119.828,116.011 cw(c120.433,116.615) MEM0.46@119.588,116.748 ; MEM3.46@119.103,48.943 cw(c119.243,48.155) 119.808,48.721 cw(c120.374,49.286) MEM3.46@119.586,49.426 ; MEM3.46@119.115,50.27 ccw(c119.281,51.331) 120.04,50.571 ; MEM2.46@119.115,71.227 cw(c119.281,70.166) 120.04,70.925 ; MEM2.46@119.115,72.706 ccw(c119.281,73.767) 120.04,73.008 ; MEM1.46@119.115,93.664 cw(c119.281,92.603) 120.04,93.362 ; MEM1.46@119.115,95.143 ccw(c119.281,96.204) 120.04,95.445 ; MEM0.46@119.115,116.1 cw(c119.281,115.039) 120.04,115.799 ; MEM3.46@119.13,48.793 cw(c119.305,47.804) 120.015,48.514 ; EXT.46@119.618,22.922 cw(c120.984,23.034) 120.015,24.003 ; MEM3.46@119.736,49.399 ccw(c120.725,49.224) 120.015,48.514 ; MEM3.46@119.739,49.646 cw(c120.8,49.812) 120.04,50.571 ; MEM2.46@119.739,71.851 ccw(c120.8,71.685) 120.04,70.925 ; MEM2.46@119.739,72.083 cw(c120.8,72.249) 120.04,73.008 ; MEM1.46@119.739,94.287 ccw(c120.8,94.121) 120.04,93.362 ; MEM1.46@119.739,94.519 cw(c120.8,94.685) 120.04,95.445 ; MEM0.46@119.739,116.724 ccw(c120.8,116.558) 120.04,115.799 ; MEM0.46@119.748,116.843 cw(c121.527,116.852) 120.269,118.11 ; v1@121.231,162.592 ccw(c120.968,162.427) 120.968,162.738 ; v1@121.231,162.883 cw(c120.968,163.049) 120.968,162.738 ; v1(121.463,162.738) 120.968,162.738 ; v1@149.86,166.299 cw(c149.86,165.638) 150.327,166.106 cw(c150.795,166.573) v1@150.134,166.573 ; v1(149.86,166.573) 150.393,166.04 ; 150.393,165.711 ccw(c150.788,165.711) U1.35@150.758,165.318 ; 150.393,165.876 ccw(c150.8,165.876) U1.35@150.77,165.47 ; U1.35@150.781,165.622 cw(c150.812,166.04) 150.393,166.04 ; U1.35@151.892,165.1 150.393,165.1 150.393,166.04 ; 120.015,24.003 120.015,48.514 ; 120.015,48.514 MEM3.46@118.999,49.53 120.04,50.571 ; 120.04,50.571 120.04,70.925 ; 120.04,70.925 MEM2.46@118.999,71.967 120.04,73.008 ; 120.04,73.008 120.04,93.362 ; 120.04,93.362 MEM1.46@118.999,94.403 120.04,95.445 ; 120.04,95.445 120.04,115.799 ; 120.04,115.799 MEM0.46@118.999,116.84 120.269,118.11 ; 120.269,118.11 120.269,162.039 120.968,162.738
  Bottom Layer w0.152: v1(121.463,162.738) 126.492,167.767 148.666,167.767 v1(149.86,166.573) ; v1@121.463,163.012 ccw(c121.463,163.673) 121.93,163.205 ccw(c122.398,162.738) v1@121.737,162.738 ; v1@149.586,166.573 ccw(c148.925,166.573) 149.393,167.041 ccw(c149.86,167.508) v1@149.86,166.847
D23: EXT.48 MEM0.48 MEM1.48 MEM2.48 MEM3.48 U1.33 | length 239.5
  Top Layer w0.152: EXT.48@116.332,22.86 117.475,24.003 ; EXT.48@116.368,23.302 ccw(c116.435,24.112) 117.01,23.538 ccw(c117.584,22.963) EXT.48@116.774,22.896 ; EXT.48@116.381,23.454 ccw(c116.471,24.542) 117.242,23.77 ccw(c118.014,22.999) EXT.48@116.926,22.909 ; EXT.48@116.394,23.606 ccw(c116.506,24.972) 117.475,24.003 ; MEM3.48@116.528,49.969 ccw(c116.626,50.598) 117.076,50.147 ccw(c117.527,49.697) MEM3.48@116.898,49.599 ; MEM2.48@116.528,71.528 cw(c116.626,70.899) 117.076,71.349 cw(c117.527,71.799) MEM2.48@116.898,71.898 ; MEM2.48@116.528,72.405 ccw(c116.626,73.034) 117.076,72.584 ccw(c117.527,72.134) MEM2.48@116.898,72.035 ; MEM1.48@116.528,93.965 cw(c116.626,93.336) 117.076,93.786 cw(c117.527,94.236) MEM1.48@116.898,94.335 ; MEM1.48@116.528,94.842 ccw(c116.626,95.471) 117.076,95.021 ccw(c117.527,94.571) MEM1.48@116.898,94.472 ; MEM0.48@116.528,116.401 cw(c116.626,115.772) 117.076,116.223 cw(c117.527,116.673) MEM0.48@116.898,116.771 ; MEM0.48@116.528,117.279 ccw(c116.626,117.908) 117.076,117.457 ccw(c117.527,117.007) MEM0.48@116.898,116.909 ; MEM3.48@116.537,49.093 cw(c116.64,48.507) 117.061,48.928 cw(c117.482,49.349) MEM3.48@116.896,49.452 ; MEM3.48@116.551,50.119 ccw(c116.684,50.964) 117.288,50.359 ccw(c117.893,49.755) MEM3.48@117.048,49.622 ; MEM2.48@116.551,71.377 cw(c116.684,70.533) 117.288,71.137 cw(c117.893,71.742) MEM2.48@117.048,71.874 ; MEM2.48@116.551,72.556 ccw(c116.684,73.401) 117.288,72.796 ccw(c117.893,72.191) MEM2.48@117.048,72.059 ; MEM1.48@116.551,93.814 cw(c116.684,92.969) 117.288,93.574 cw(c117.893,94.179) MEM1.48@117.048,94.311 ; MEM1.48@116.551,94.993 ccw(c116.684,95.837) 117.288,95.233 ccw(c117.893,94.628) MEM1.48@117.048,94.496 ; MEM0.48@116.551,116.251 cw(c116.684,115.406) 117.288,116.011 cw(c117.893,116.615) MEM0.48@117.048,116.748 ; MEM0.48@116.551,117.429 ccw(c116.684,118.274) 117.288,117.669 ccw(c117.893,117.065) MEM0.48@117.048,116.932 ; MEM3.48@116.563,48.943 cw(c116.703,48.155) 117.268,48.721 cw(c117.834,49.286) MEM3.48@117.046,49.426 ; MEM3.48@116.575,50.27 ccw(c116.741,51.331) 117.5,50.571 ; MEM2.48@116.575,71.227 cw(c116.741,70.166) 117.5,70.925 ; MEM2.48@116.575,72.706 ccw(c116.741,73.767) 117.5,73.008 ; MEM1.48@116.575,93.664 cw(c116.741,92.603) 117.5,93.362 ; MEM1.48@116.575,95.143 ccw(c116.741,96.204) 117.5,95.445 ; MEM0.48@116.575,116.1 cw(c116.741,115.039) 117.5,115.799 ; MEM0.48@116.575,117.58 ccw(c116.741,118.641) 117.5,117.881 ; MEM3.48@116.59,48.793 cw(c116.765,47.804) 117.475,48.514 ; EXT.48@117.078,22.922 cw(c118.444,23.034) 117.475,24.003 ; MEM3.48@117.196,49.399 ccw(c118.185,49.224) 117.475,48.514 ; MEM3.48@117.199,49.646 cw(c118.26,49.812) 117.5,50.571 ; MEM2.48@117.199,71.851 ccw(c118.26,71.685) 117.5,70.925 ; MEM2.48@117.199,72.083 cw(c118.26,72.249) 117.5,73.008 ; MEM1.48@117.199,94.287 ccw(c118.26,94.121) 117.5,93.362 ; MEM1.48@117.199,94.519 cw(c118.26,94.685) 117.5,95.445 ; MEM0.48@117.199,116.724 ccw(c118.26,116.558) 117.5,115.799 ; MEM0.48@117.199,116.956 cw(c118.26,117.122) 117.5,117.881 ; v1@118.577,163.027 cw(c118.109,162.559) 118.77,162.559 cw(c119.431,162.559) v1@118.964,163.027 ; v1(118.77,163.22) 118.77,161.658 117.5,160.388 117.5,117.881 ; v1@149.535,161.493 ccw(c148.874,161.493) 149.342,161.961 ccw(c149.809,162.428) v1@149.809,161.767 ; v1(149.809,161.493) 149.301,162.001 149.301,167.322 149.619,167.64 ; U1.33@150.341,167.303 ccw(c149.619,166.698) 149.619,167.64 ; U1.33@150.341,167.977 cw(c149.619,168.582) 149.619,167.64 ; U1.33@150.457,167.401 ccw(c149.946,166.972) 149.946,167.64 ccw(c149.946,168.308) U1.33@150.457,167.879 ; U1.33@151.892,167.64 149.619,167.64 ; 117.475,24.003 117.475,48.514 ; 117.475,48.514 MEM3.48@116.459,49.53 117.5,50.571 ; 117.5,50.571 117.5,70.925 ; 117.5,70.925 MEM2.48@116.459,71.967 117.5,73.008 ; 117.5,73.008 117.5,93.362 ; 117.5,93.362 MEM1.48@116.459,94.403 117.5,95.445 ; 117.5,95.445 117.5,115.799 ; 117.5,115.799 MEM0.48@116.459,116.84 117.5,117.881
  Bottom Layer w0.152: v1@118.577,163.027 ccw(c118.109,162.559) 118.109,163.22 ccw(c118.109,163.881) v1@118.577,163.414 ; v1(118.77,163.22) 117.665,163.22 117.323,162.877 117.323,162.103 117.529,161.896 149.406,161.896 ; v1@149.537,161.523 ccw(c149.083,161.573) 149.406,161.896 ; v1@149.779,161.765 cw(c149.729,162.219) 149.406,161.896 ; v1(149.809,161.493) 149.406,161.896
D24: EXT.50 MEM0.50 MEM1.50 MEM2.50 MEM3.50 U1.31 | length 231.2
  Top Layer w0.152: EXT.50@113.792,22.86 114.935,24.003 ; EXT.50@113.828,23.302 ccw(c113.895,24.112) 114.47,23.538 ccw(c115.044,22.963) EXT.50@114.234,22.896 ; EXT.50@113.841,23.454 ccw(c113.931,24.542) 114.702,23.77 ccw(c115.474,22.999) EXT.50@114.386,22.909 ; EXT.50@113.854,23.606 ccw(c113.966,24.972) 114.935,24.003 ; MEM3.50@113.988,49.969 ccw(c114.086,50.598) 114.536,50.147 ccw(c114.987,49.697) MEM3.50@114.358,49.599 ; MEM2.50@113.988,71.528 cw(c114.086,70.899) 114.536,71.349 cw(c114.987,71.799) MEM2.50@114.358,71.898 ; MEM2.50@113.988,72.405 ccw(c114.086,73.034) 114.536,72.584 ccw(c114.987,72.134) MEM2.50@114.358,72.035 ; MEM1.50@113.988,93.965 cw(c114.086,93.336) 114.536,93.786 cw(c114.987,94.236) MEM1.50@114.358,94.335 ; MEM1.50@113.988,94.842 ccw(c114.086,95.471) 114.536,95.021 ccw(c114.987,94.571) MEM1.50@114.358,94.472 ; MEM0.50@113.988,116.401 cw(c114.086,115.772) 114.536,116.223 cw(c114.987,116.673) MEM0.50@114.358,116.771 ; MEM3.50@113.997,49.093 cw(c114.1,48.507) 114.521,48.928 cw(c114.942,49.349) MEM3.50@114.356,49.452 ; MEM3.50@114.011,50.119 ccw(c114.144,50.964) 114.748,50.359 ccw(c115.353,49.755) MEM3.50@114.508,49.622 ; MEM2.50@114.011,71.377 cw(c114.144,70.533) 114.748,71.137 cw(c115.353,71.742) MEM2.50@114.508,71.874 ; MEM2.50@114.011,72.556 ccw(c114.144,73.401) 114.748,72.796 ccw(c115.353,72.191) MEM2.50@114.508,72.059 ; MEM1.50@114.011,93.814 cw(c114.144,92.969) 114.748,93.574 cw(c115.353,94.179) MEM1.50@114.508,94.311 ; MEM1.50@114.011,94.993 ccw(c114.144,95.837) 114.748,95.233 ccw(c115.353,94.628) MEM1.50@114.508,94.496 ; MEM0.50@114.011,116.251 cw(c114.144,115.406) 114.748,116.011 cw(c115.353,116.615) MEM0.50@114.508,116.748 ; MEM3.50@114.023,48.943 cw(c114.163,48.155) 114.728,48.721 cw(c115.294,49.286) MEM3.50@114.506,49.426 ; MEM3.50@114.035,50.27 ccw(c114.201,51.331) 114.96,50.571 ; MEM2.50@114.035,71.227 cw(c114.201,70.166) 114.96,70.925 ; MEM2.50@114.035,72.706 ccw(c114.201,73.767) 114.96,73.008 ; MEM1.50@114.035,93.664 cw(c114.201,92.603) 114.96,93.362 ; MEM1.50@114.035,95.143 ccw(c114.201,96.204) 114.96,95.445 ; MEM0.50@114.035,116.1 cw(c114.201,115.039) 114.96,115.799 ; MEM3.50@114.05,48.793 cw(c114.225,47.804) 114.935,48.514 ; EXT.50@114.538,22.922 cw(c115.904,23.034) 114.935,24.003 ; MEM3.50@114.656,49.399 ccw(c115.645,49.224) 114.935,48.514 ; MEM3.50@114.659,49.646 cw(c115.72,49.812) 114.96,50.571 ; MEM2.50@114.659,71.851 ccw(c115.72,71.685) 114.96,70.925 ; MEM2.50@114.659,72.083 cw(c115.72,72.249) 114.96,73.008 ; MEM1.50@114.659,94.287 ccw(c115.72,94.121) 114.96,93.362 ; MEM1.50@114.659,94.519 cw(c115.72,94.685) 114.96,95.445 ; MEM0.50@114.659,116.724 ccw(c115.72,116.558) 114.96,115.799 ; v1@117.62,162.662 cw(c116.959,162.662) 117.427,162.194 cw(c117.894,161.727) v1@117.894,162.388 ; v1(117.894,162.662) 114.96,159.728 114.96,117.881 114.605,117.526 114.605,116.84 MEM0.50@113.919,116.84 114.96,115.799 ; U1.31@151.522,169.81 cw(c150.627,168.915) 151.892,168.915 cw(c153.157,168.915) U1.31@152.262,169.81 ; U1.31@151.629,169.917 cw(c150.995,169.283) 151.892,169.283 cw(c152.789,169.283) U1.31@152.155,169.917 ; v1@151.698,169.104 ccw(c151.231,169.571) 151.892,169.571 ccw(c152.553,169.571) v1@152.086,169.104 ; v1(151.892,168.91) U1.31@151.892,170.18 ; 114.935,24.003 114.935,48.514 ; 114.935,48.514 MEM3.50@113.919,49.53 114.96,50.571 ; 114.96,50.571 114.96,70.925 ; 114.96,70.925 MEM2.50@113.919,71.967 114.96,73.008 ; 114.96,73.008 114.96,93.362 ; 114.96,93.362 MEM1.50@113.919,94.403 114.96,95.445 ; 114.96,95.445 114.96,115.799
  Bottom Layer w0.152: v1(117.894,162.662) 120.424,162.662 120.91,162.176 146.569,162.176 151.892,167.499 v1(151.892,168.91) ; v1@118.088,162.468 cw(c118.555,162.001) 118.555,162.662 cw(c118.555,163.323) v1@118.088,162.855 ; v1@151.698,168.716 cw(c151.231,168.249) 151.892,168.249 cw(c152.553,168.249) v1@152.086,168.716